# EAGLE board Panel Template (EAGLE 7.7.0)

Size 266 x 178 mm. Coordinates in mm from the lower left corner, seen from the top.
Outline: 0,0 266,0 266,178 0,178 0,0
Copper layers (1*16): Top 0.035mm / dielectric 1mm / Bottom 0.035mm
Design rules "default": minimum track width 0.15mm, minimum drill 0.3mm, track to track 0.15mm, track to pad 0.15mm, pad to pad 0.15mm, via to via 0.15mm, smd to smd 0.15mm, copper to edge 0.15mm, drill to drill 0.15mm, minimum pad ring 10mil, minimum via ring 5mil, stop-mask expansion 4mil, vias tented up to drill 0.6mm, thermal gap 10mil
Net classes: 1 ANT: clearance 0.381 mm
Holes 4 mm at 5,5 261,5 5,173 256,173

## Footprints (pad centres in the part's own frame; a part is rotated, then mirrored left to right if it is on the bottom)
FIDUCIAL-1X2.5-STOP = smd 1 x 1: 1 0,0

## Placement (x,y rotation side)
JP53  FIDUCIAL1X2.5-STOP  [FIDUCIAL-1X2.5-STOP]  5,12.5 0 top
JP54  FIDUCIAL1X2.5-STOP  [FIDUCIAL-1X2.5-STOP]  5,12.5 0 bottom
JP55  FIDUCIAL1X2.5-STOP  [FIDUCIAL-1X2.5-STOP]  248.5,173 0 top
JP56  FIDUCIAL1X2.5-STOP  [FIDUCIAL-1X2.5-STOP]  248.5,173 0 bottom

## Library data of the parts
JP53-JP56 = CISECO eaglecad designs

## Text on the board
tPlace: 29/06/15 LWK | 266 x 178 mm | 61.9 x 55 mm Step | 4 x 3 Repeat